# Altium PCB PCB2.PcbDoc
Units mil, origin at the board's own origin, x right, y up, seen from the top; angles counter-clockwise.
Board outline 5225 x 2380 mil, 2 copper layers (Top Layer, Bottom Layer), stack 28.4 mil thick; 22 components, 15 nets, 72 pads, 2 vias.
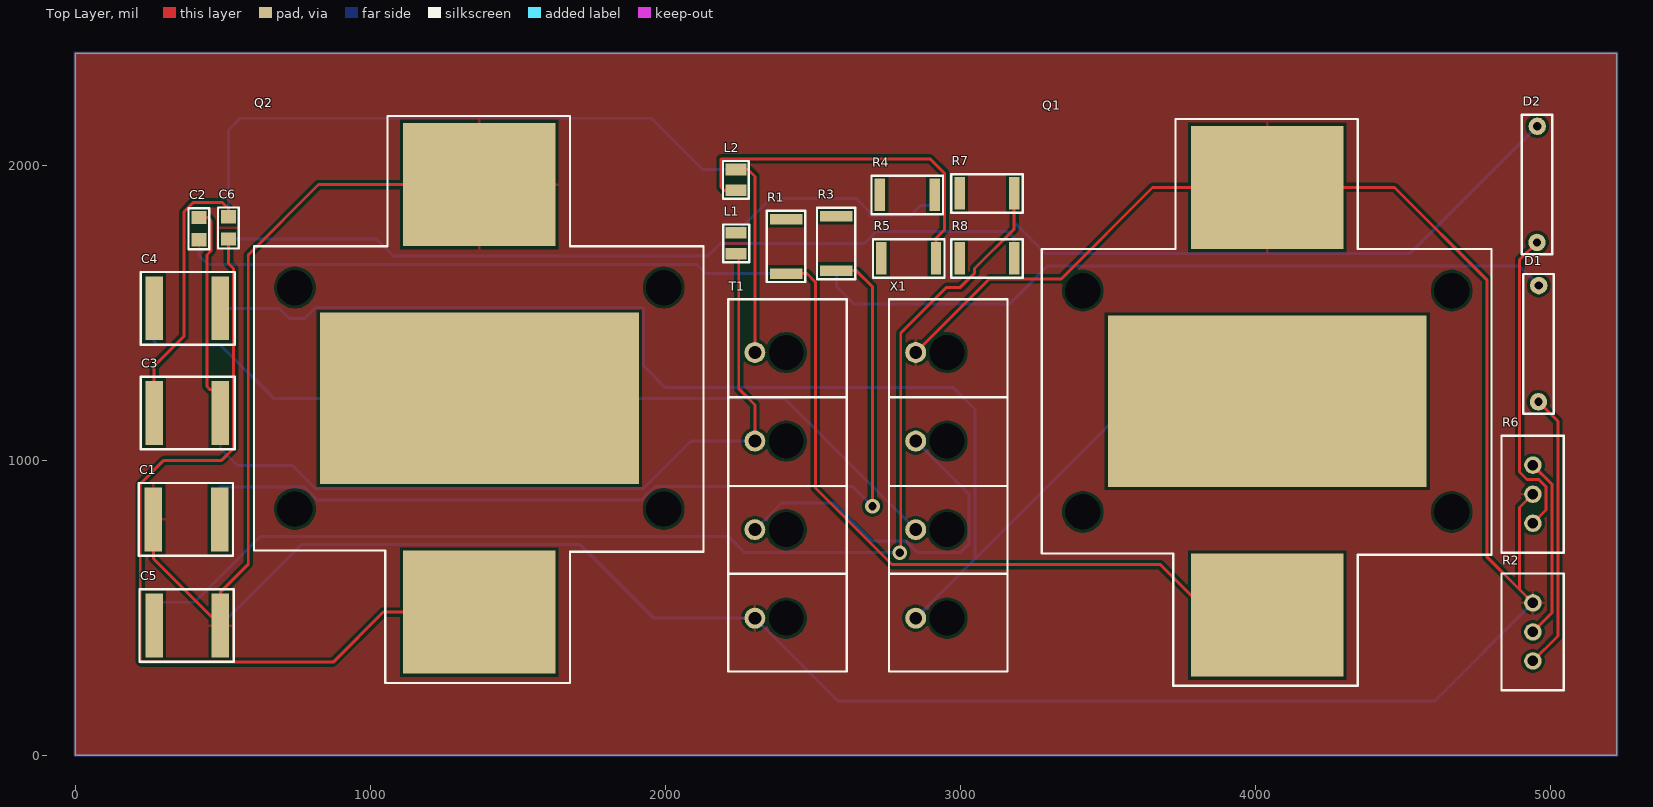
[diagram p0: Top Layer view]
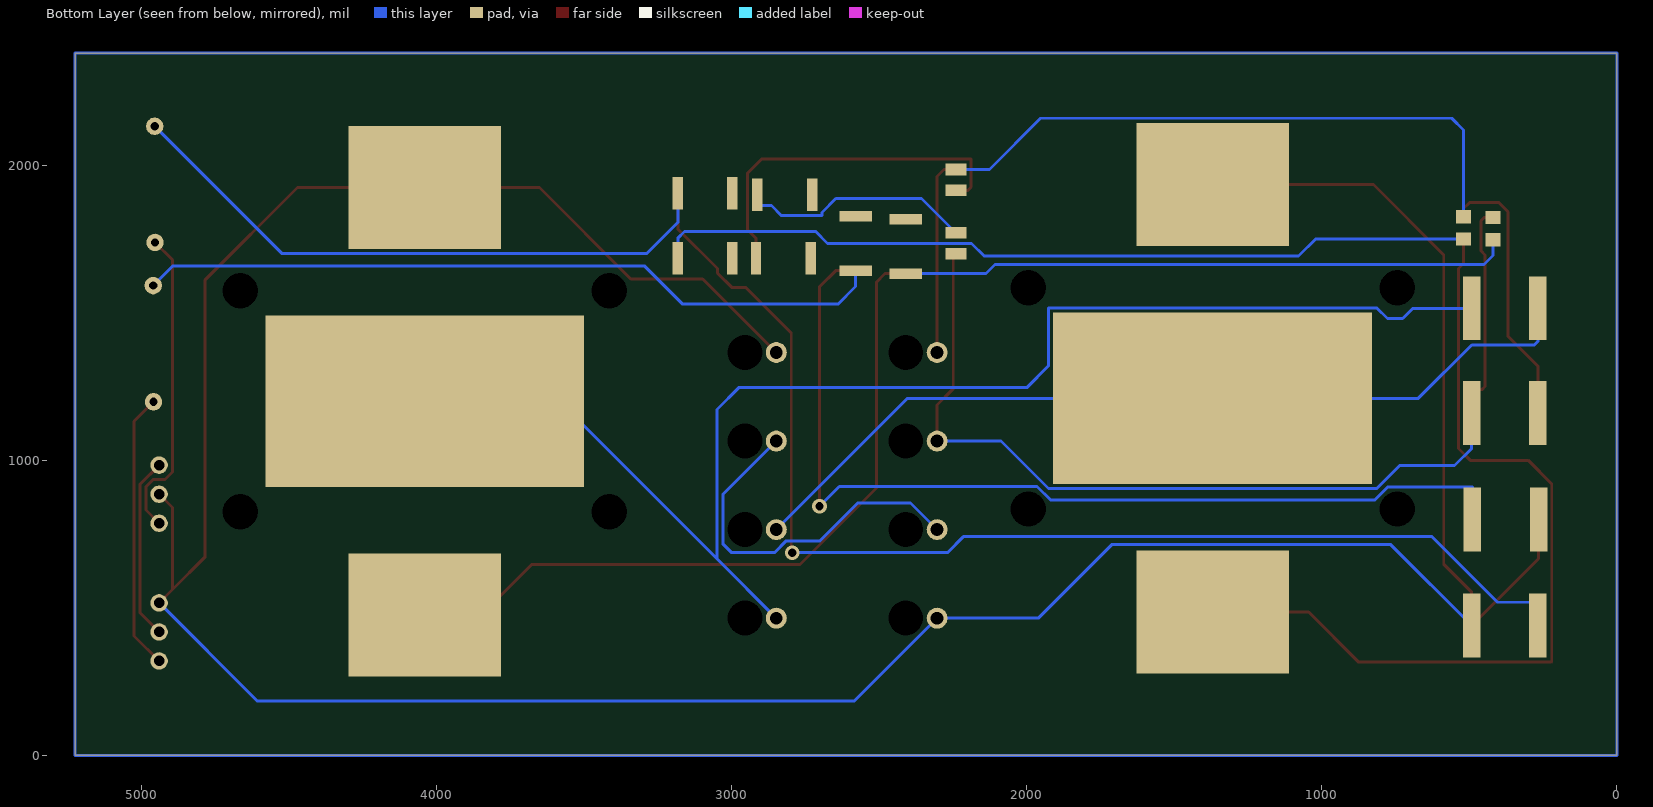
[diagram p1: Bottom Layer view, seen from below]
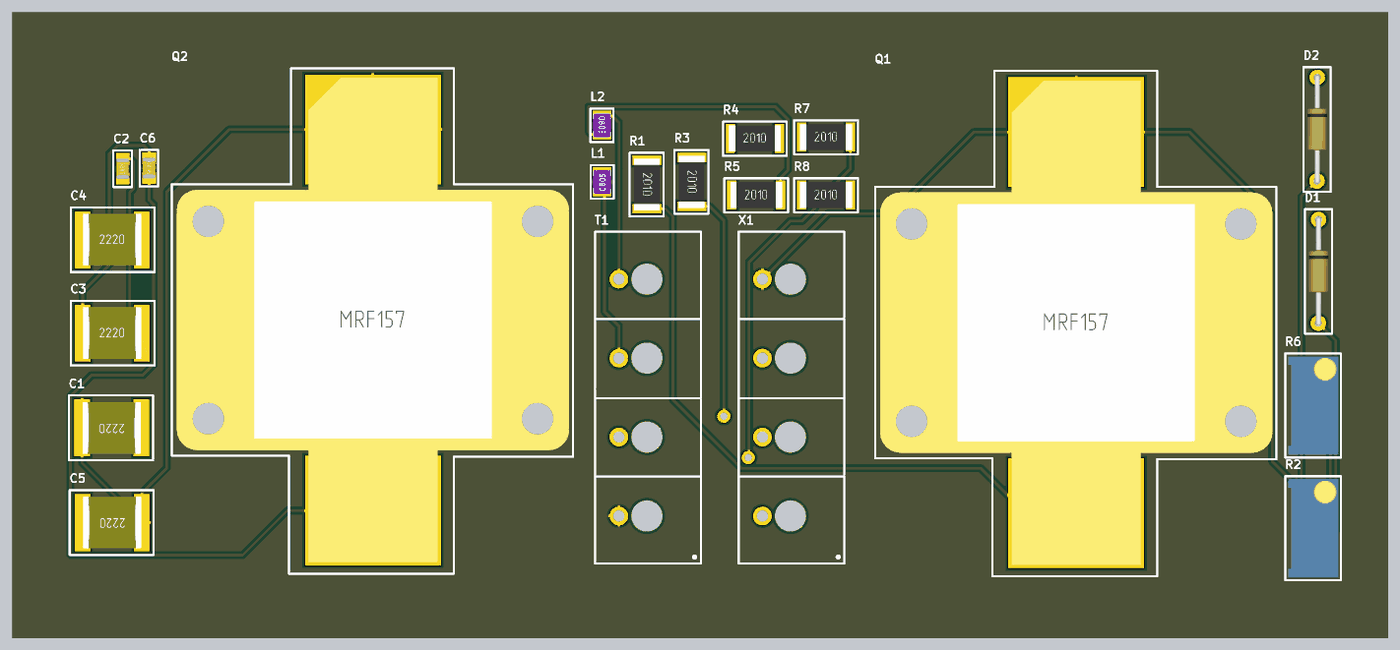
[diagram p2: 3D render of the assembled board from above, using the file's embedded part models]

## Layer stack, top to bottom
Top Solder: solder mask 0.4, Solder Resist, Dk 3.5
Top Layer: signal copper 1.4
Dielectric 1: dielectric 25.6, FR-4, Dk 4.8
Bottom Layer: signal copper 1.4
Bottom Solder: solder mask 0.4, Solder Resist, Dk 3.5

## Board outline
0,0 0,2380 5225,2380 5225,0

## Design rules (kind name [scope] priority, off if disabled: settings)
Clearance [All] p1: gap=10 ignorepadtopadclearanceinfootprint=FALSE except(0: Arc-Hole Track-Hole SMDPad-Hole THPad-Hole Via-Hole Fill-Hole Poly-Hole Region-Hole Text-Hole)
PolygonConnect [All] p1: connectstyle=Relief reliefconductorwidth=10 reliefentries=4 polygonreliefangle="90 Angle" airgapwidth=10
RoutingVias [All] p1: holewidth=28 width=50 viastyle="Through Hole" minholewidth=28 minwidth=50 maxholewidth=28 maxwidth=50
SolderMaskExpansion [All] p1: expansion=4 istentingtop=FALSE
Width [All] p1: maxlimit=10 minlimit=10 preferedwidth=10
30 further rules are at their usual default settings.

## Components (designator, comment, footprint, x,y, rotation, side; value= is the part's Value field where it differs from the comment)
C1 "0.1 мкФ-10%2220" CAP_2220 377.8,800 r180 top
C2 "2.2пФ±0.25пФ 0805" CAP_0805 420,1785 r270 top
C3 "820 пФ-5%2220" CAP_2220 380,1160 r0 top
C4 "0.01 мкФ-10%2220" CAP_2220 380,1515 r0 top
C5 "0.1 мкФ-10%2220" CAP_2220 380,440 r180 top
C6 "2.2пФ±0.25пФ 0805" CAP_0805 520,1787.6 r270 top
D1 "1N4148" DIODE 4960,1395 r90 top
D2 "1N4148" DIODE 4955,1935 r90 top
L1 "15 нГн 5% 0805" INDUCTOR_0805 2240,1735 r90 top
L2 "15 мкГн 5% 0805" INDUCTOR_0805 2240,1950 r270 top
Q1 "MRF157" MOSFET 4040,1200 r0 top
Q2 "MRF157" MOSFET 1370,1210 r0 top
R1 "12 кОм 5% 2010" Resistor_2010 2410,1725 r270 top
R2 "1 кОм 10% 3296" TRIMPOT 4940,418.43 r90 top
R3 "100 Ом-5% 2010" Resistor_2010 2580,1735 r270 top
R4 "24 Ом 5% 2010" Resistor_2010 2820,1900 r0 top
R5 "24 Ом 5% 2010" Resistor_2010 2825,1685 r0 top
R6 "1 кОм 10% 3296" TRIMPOT 4940,885 r90 top
R7 "100 Ом 5% 2010" Resistor_2010 3090,1905 r0 top
R8 "12 кОм 5%2010" Resistor_2010 3090,1685 r0 top
T1 "ET559885" "CON: WJ06-04P" 2410,1065 r90 top
X1 "15EDGB-3.81-04P-14-00A(H)" "CON: WJ06-04P" 2955,1065 r90 top

## Footprints (in the part's own frame and the unit in brackets; to place one, negate y for a bottom-side part, rotate by r counter-clockwise, add the part's x,y. Pads: shape width x height; smd on the part's side, far side on the other; paste and mask are expansions set on the pad)
CAP_0805 [mm]
  rect 1.14x1.3 all layers, no hole: 0(-0.95,0) 1(0.95,0)
  silkscreen extent -1.75,-0.9 1.78,0.87, body extent -1,-0.63 1,0.63, height 0.61
CAP_2220 [mm]
  rect 1.5x5.5 all layers, no hole: 0(-2.85,0) 1(2.85,0)
  silkscreen extent -4,-3.13 4.1,3.13, body extent -2.8,-2.5 2.8,2.5, height 1.8
"CON: WJ06-04P" [mm]
  round 1.8 hole 1.1: 1(-15.24,2.7) 2(-7.62,2.7) 3(0,2.7) 4(7.63,2.7)
  round 0.5 on Mech1: ""(-19.2,-4.6)
  round 0.5 on Top Overlay: ""(-19.2,-4.6)
  round 2.4 hole 3: ""(-15.24,0) ""(-7.62,0) ""(0,0) ""(7.62,0)
  silkscreen extent -19.83,-5.2 12.2,5, body extent -19.74,-5.08 12.12,4.92, height 5.95
DIODE [mm]
  round 1.5 hole 0.7: 0(-5,0.025) 1(5,0)
  silkscreen extent -6.02,-1.3 6,1.33, body extent -5.25,-0.95 5.25,0.95, height 2.94
INDUCTOR_0805 [mm]
  rect 1x1.8 all layers, no hole: 0(-0.9,0) 1(0.9,0)
  silkscreen extent -1.62,-1.13 1.62,1.1, body extent -1.15,-0.89 1.15,0.89, height 1.43
MOSFET [mm]
  round 0 hole 3.05: 0(-15.875,-9.525) 0(-15.875,9.525) 0(15.875,-9.525) 0(15.875,9.525)
  rect 13.1x10.6 all layers, no hole: 1(0,18.4) 2(0,-18.4)
  rect 27.45x14.75 all layers, no hole: 3(0,0)
  silkscreen extent -19.4,-24.5 19.3,24.3, body extent -18.92,-23.38 18.93,23.38, height 8.38
Resistor_2010 [mm]
  rect 0.9x2.8 all layers, no hole: 0(-2.35,0) 1(2.35,0)
  silkscreen extent -3.08,-1.67 3.07,1.62, body extent -2.5,-1.25 2.5,1.25, height 0.55
TRIMPOT [mm]
  round 1.5 hole 0.9: 1(2.5,0) 2(0,0) 3(-2.5,0)
  silkscreen extent -5.03,-2.65 5.03,2.7, body extent -4.76,-2.41 4.76,2.41, height 14.95

## Part data
C1 C4: library part cond_2220C, Manufacturer="Kemet Electronics", PartNumber=C2220C103KGRACAUTO, Href=https://www.chipdip.ru/product0/8005312595, Kind=Capacitor
C2 C6: library part cond_2220C, Manufacturer="Murata Electronics", PartNumber=GRM2165C1H2R2CD01D, Href=https://www.chipdip.ru/product/grm2165c1h2r2c, Kind=Capacitor
C3: library part cond_2220C, Manufacturer="Cornell Dubilier", PartNumber=MC22FF821J-F, Href=https://www.chipdip.ru/product0/8004609482, Kind=Capacitor
C5: library part cond_2220C, Manufacturer=PDC, PartNumber=MA2220XR104K500ERG, Href=https://www.chipdip.ru/product0/8001594404, Kind=Capacitor
L1: library part inductor, Manufactured="Murata Electronics", PartNumber=LQW2BAS15NJ00L, Href=https://www.chipdip.ru/product0/8005346407, Kind=Inductors
L2: library part inductor, Manufactured=Abracon, PartNumber=AIML-0805-150K-T, Href=https://www.chipdip.ru/product0/8006375326, Kind=Inductors
Q1 Q2: library part MTF157, Kind=Transistor, PartNumber=MRF157
R1: library part Resistor_2010R, Manufacturer=Yageo, PartNumber=RC2010JK-0712KL, Href=https://www.chipdip.ru/product0/8147844003, Kind=Resistor
R2 R6: library part Trimpot, Manufacturer=Bourns, PartNumber=3296X-1-102LF, Href=https://www.chipdip.ru/product0/8038726753, Kind=Trimpot
R3 R7: library part Resistor_2010R, Manufacturer=VIKING, PartNumber=CR-0AJL4--100R, Href=https://www.chipdip.ru/product0/8004209699, Kind=Resistor
R4 R5: library part Resistor_2010R, Manufacturer=VIKING, PartNumber=CR-0AJL4---24R, Href=https://www.chipdip.ru/product0/8014261265, Kind=Resistor
R8: library part Resistor_2010R, Manufacturer=Hottech, PartNumber=RI2010L123JT, Href=https://www.chipdip.ru/product0/8017128381, Kind=Resistor
T1: library part Transformer, Manufacturer="ПО Электротехник", Href=https://www.chipdip.ru/product/et559885, Kind=Transformer, PartNumber=ET559885
X1: library part 4-Connector, Manufacturer="Degson Electronics", Href=https://www.chipdip.ru/product/15edgb-3.81-04p-14-00a-h, Kind=Connector, PartNumber=15EDGB-3.81-04P-14-00A(H)
D1 D2: Kind=Diode, PartNumber=1N4148

## Via types
v1: diameter 50, hole 28, Top Layer to Bottom Layer, 2 vias

## Nets (pads, with @x,y where several pads share a name; then routed paths per layer and width w, separated by ;. In a path a pad name is that pad's centre, name@x,y a point inside that pad or via, vN(x,y) a via of type N, cw(c..) or ccw(c..) an arc to the next point about the centre after c; other vN are vias at no path point)
GND: C1.1 C5.0 Q1.1 Q2.1 R2.1 R6.2 T1.1 X1.4 | length 11346.2
  Top Layer w10: C1.1 265.59,666.61 C5.0 492.2,553 587,647.8 587,1696 825.41,1934.41 Q2.1 ; X1.4 3098,1614.69 3341.69,1614.69 3651.41,1924.41 Q1.1 4471,1924.41 4784,1611.41 4784,672.85 4895,561.85 ; R2.1 4895,561.85 ; R6.2 4895,840 4895,561.85
  Bottom Layer w10: C5.0 766.2,714 1712,714 1961,465 T1.1 2583.7,185 4608.15,185 R2.1
NetC1_0: C1.0 D1.1 R3.1 | length 5815.2
  Top Layer w10: R3.1 2647.52,1642.48 2702,1588 v1(2702,844)
  Bottom Layer w10: C1.0 490,910.04 776.08,910.04 820.12,866 1919.88,866 1964.88,911 2635,911 v1(2702,844) ; R3.1 2580,1589 2640,1529 3166,1529 3296,1659 4892.85,1659 D1.1
NetC2_0: C2.0 C3.1 L1.0 T1.3 | length 3462.3
  Top Layer w10: C2.0 450,1822.4 461,1811.4 461,1710 447,1696 447,1250 458,1239 492.2,1239 C3.1 ; L1.0 2249,1699.57 2249,1242 2303.7,1187.3 T1.3
  Bottom Layer w10: C3.1 492.2,1040 550.2,982 736,982 814,904 1926,904 2087,1065 T1.3
NetC2_1: C2.1 Q1.2 R1.1 | length 4586.9
  Top Layer w10: R1.1 2480,1632.48 2509,1603.48 2509,906 2768.42,646.58 3677.42,646.58 3848.41,475.59 Q1.2
  Bottom Layer w10: C2.1 420,1694 451,1663 2108,1663 2138.52,1632.48 R1.1
NetC3_0: C3.0 C6.0 L2.0 T1.4 | length 3696.4
  Top Layer w10: C3.0 267.8,1319 369,1420.2 369,1842 400,1873 500,1873 520,1853 C6.0 ; L2.0 2280,1985.43 2303.7,1961.73 T1.4
  Bottom Layer w10: C6.0 520,2119 560,2159 1953,2159 2126.57,1985.43 L2.0
NetC4_0: C4.0 Q2.3 X1.2 | length 2957.1
  Bottom Layer w10: C4.0 267.8,1403.2 280,1391 492,1391 673,1210 Q2.3 2403.7,1210 X1.2
NetC4_1: C4.1 Q1.3 X1.1 | length 4846
  Bottom Layer w10: C4.1 691,1515 726,1480 778,1480 814,1516 1926,1516 1926,1320 2000,1246 2976,1246 3050,1172 3050,666.3 ; X1.1 3050,666.3 ; Q1.3 3583.7,1200 3050,666.3
NetC5_1: C5.1 D2.1 R7.1 | length 6220.8
  Top Layer w10: v1(2795,687) 2798,690 2798,1431 2953,1586 3000,1586 3048,1634 3048,1649.48 3182.52,1784 R7.1
  Bottom Layer w10: C5.1 267.8,519 405,519 627,741 2215,741 2269,687 v1(2795,687) ; R7.1 3182.52,1806 3288.52,1700 4523.15,1700 D2.1
NetC6_1: C6.1 Q2.2 R8.1 | length 5702.8
  Top Layer w10: C6.1 520,1667 537,1650 537,1040 497,1000 301,1000 221,920 221,318 223,316 875,316 1044.59,485.59 Q2.2
  Bottom Layer w10: C6.1 1020.8,1750.2 1079,1692 2144,1692 2187,1735 2675,1735 2715,1775 3160,1775 3182.52,1752.48 R8.1
NetD1_0: D1.0 R2.3 | length 940.7
  Top Layer w10: R2.3 5025,405 5025,1132.17 D1.0
NetD2_0: D2.0 R6.3 | length 1055
  Top Layer w10: R6.3 4984.53,831.1 4984.53,910.47 4960,935 4920,935 4895,960 4895,1679.13 D2.0
NetL1_1: L1.1 R4.1 | length 802.4
  Bottom Layer w10: L1.1 2356.57,1887 2647,1887 2694,1840 2694,1829 2831,1829 2865,1863 2912.52,1863 R4.1
NetL2_1: L2.1 R5.1 | length 1227.7
  Top Layer w10: L2.1 2200,1914.57 2189,1925.57 2189,2021 2898,2021 2946,1973 2946,1781 2917.52,1752.52 R5.1
NetR2_2: R2.2 R6.1 | length 618.5
  Top Layer w10: R2.2 5004.53,482.95 5004.53,918.9 R6.1
NetT1_2: T1.2 X1.3 | length 1268.7
  Bottom Layer w10: T1.2 2393.7,855 2573,855 2701,727 2815,727 2855,687 3000,687 3030,717 3030,883.7 X1.3
pads on no net: Q1.0 Q2.0 R1.0 R3.0 R4.0 R5.0 R7.0 R8.0 T1. X1.
copper on no net: | length 15210
  Bottom Layer w10: 0,0 5225,0 5225,2380 0,2380 0,0

## Polygon pours and split planes (outlines as drawn)
GND on Top Layer "GND_L01_P000" (solid, remove dead copper, pour order 0): 0,2380 5225,2380 5225,0 0,0